# Altium PCB gravpower 007.PcbDoc (part 1 of 2)
Units mil, origin at the board's own origin, x right, y up, seen from the top; angles counter-clockwise.
Board outline 3267.72 x 2322.83 mil, 4 copper layers (Top Layer, Signal Layer 1, Signal Layer 2, Bottom Layer), stack 59.3 mil thick; 146 components, 91 nets, 539 pads, 438 vias.
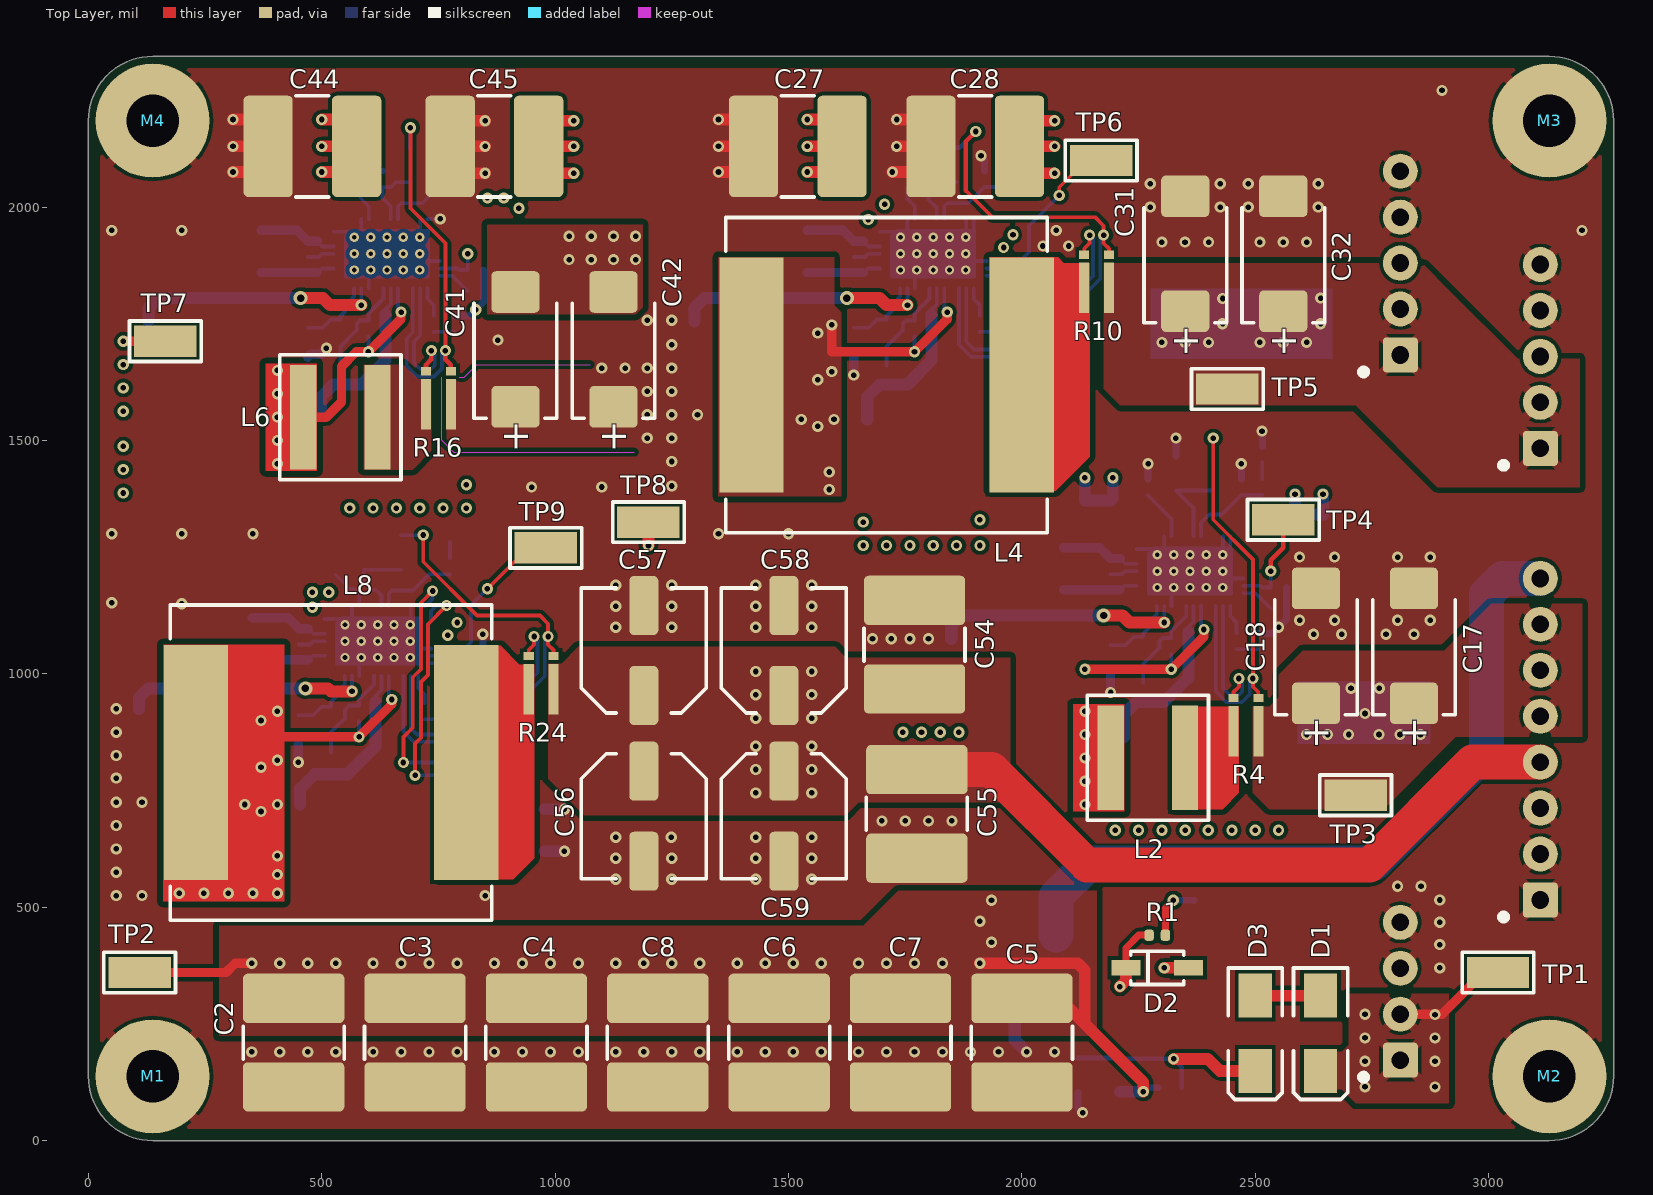
[diagram p0: Top Layer view]
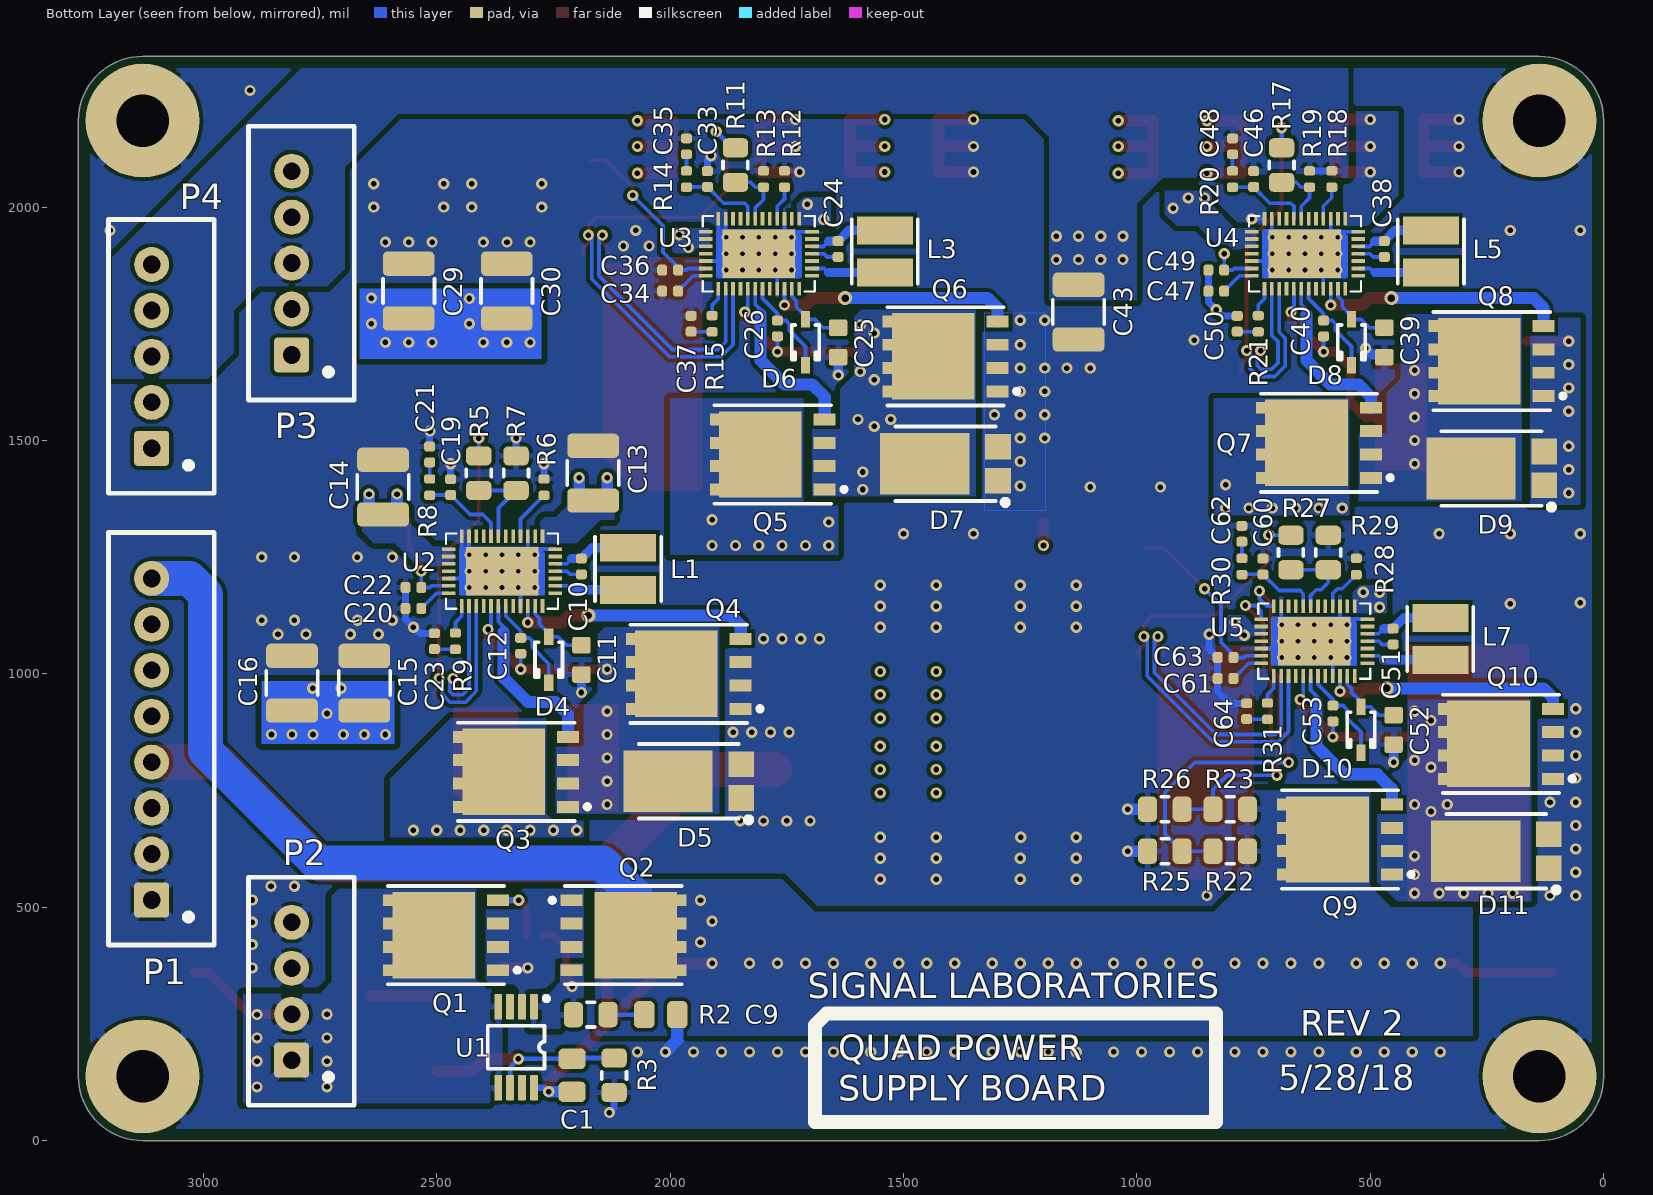
[diagram p1: Bottom Layer view, seen from below]
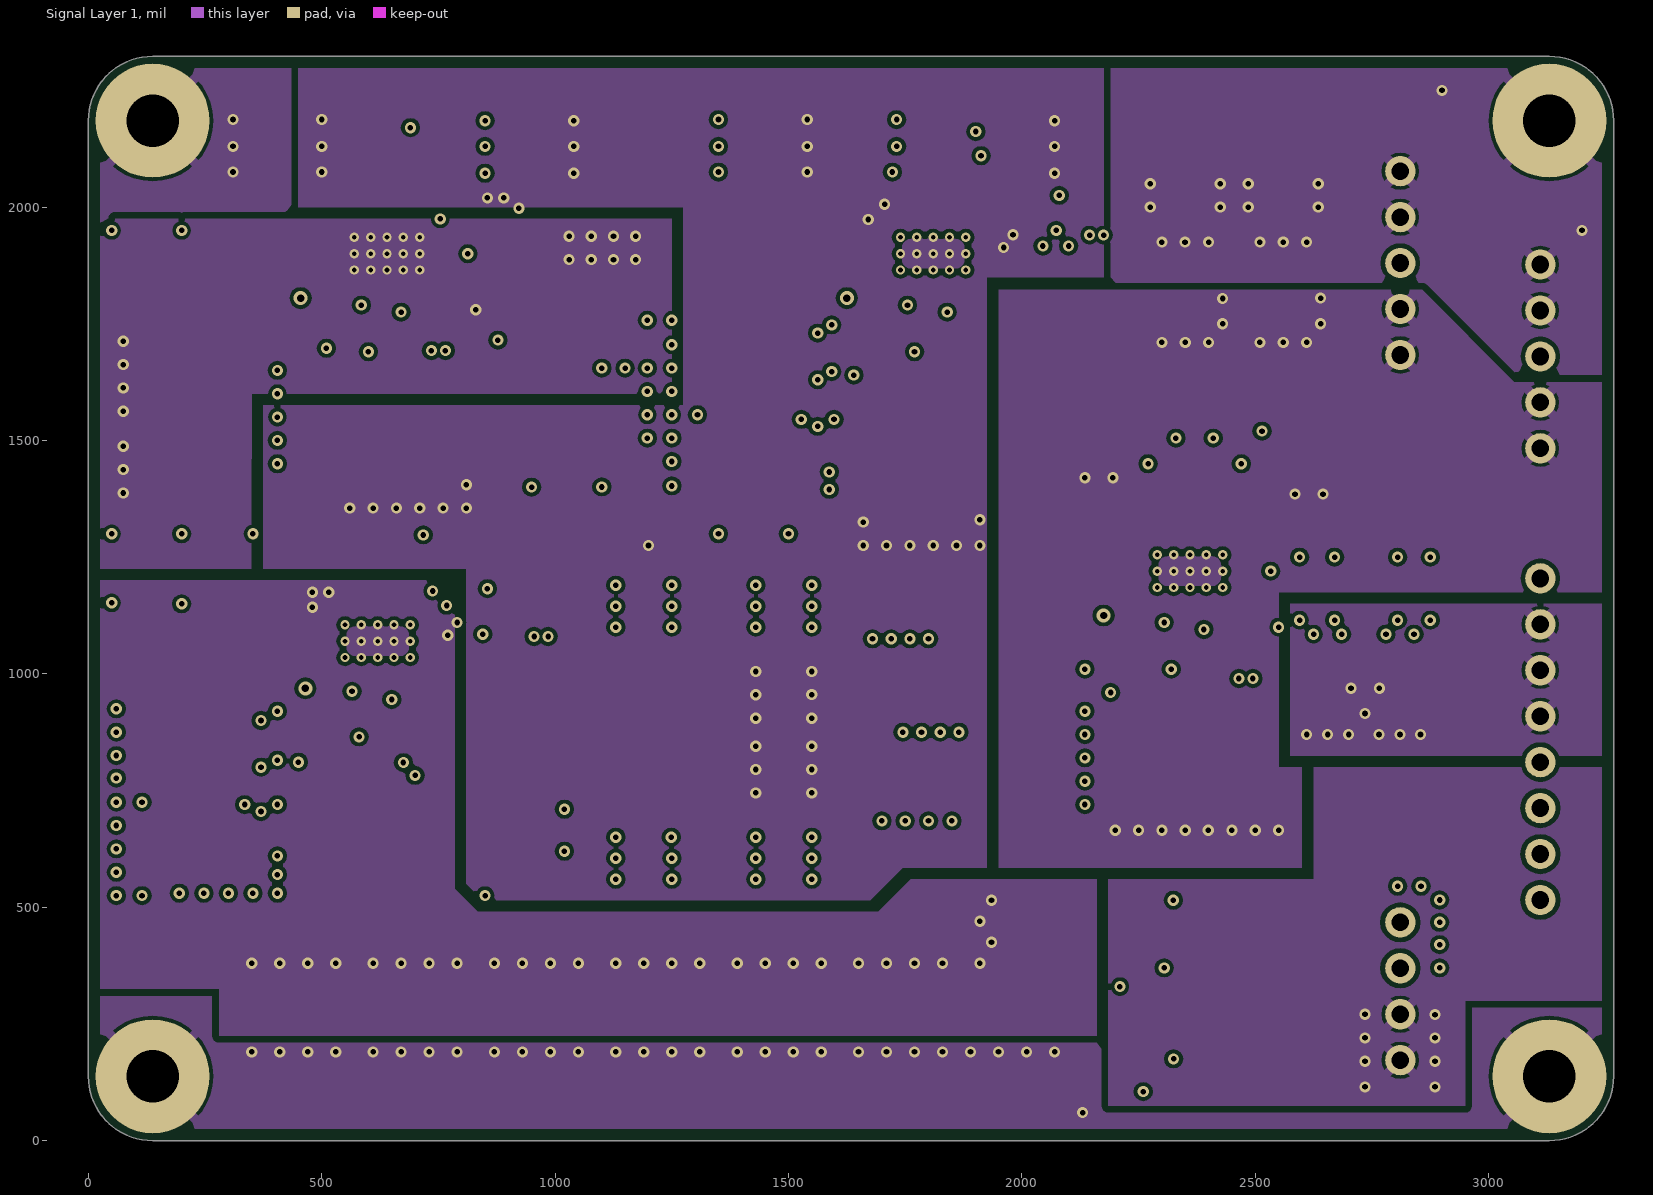
[diagram p2: Signal Layer 1]
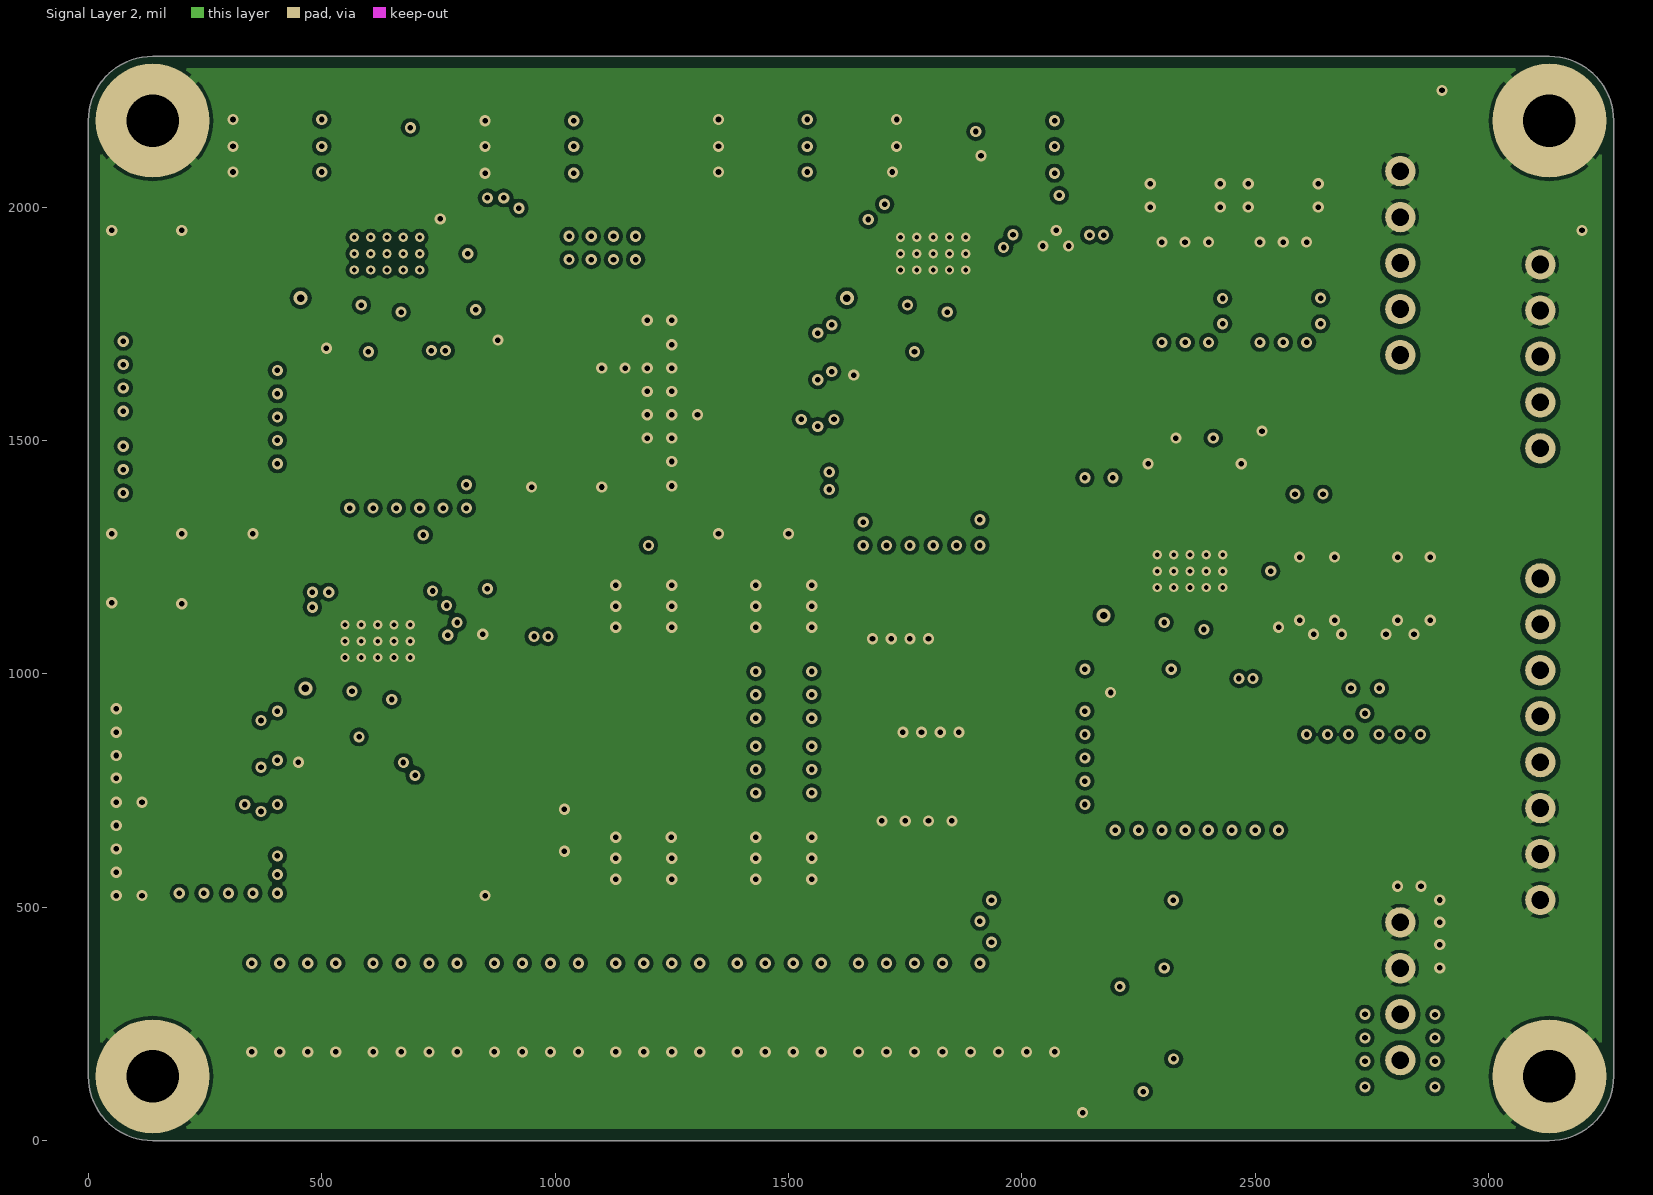
[diagram p3: Signal Layer 2]
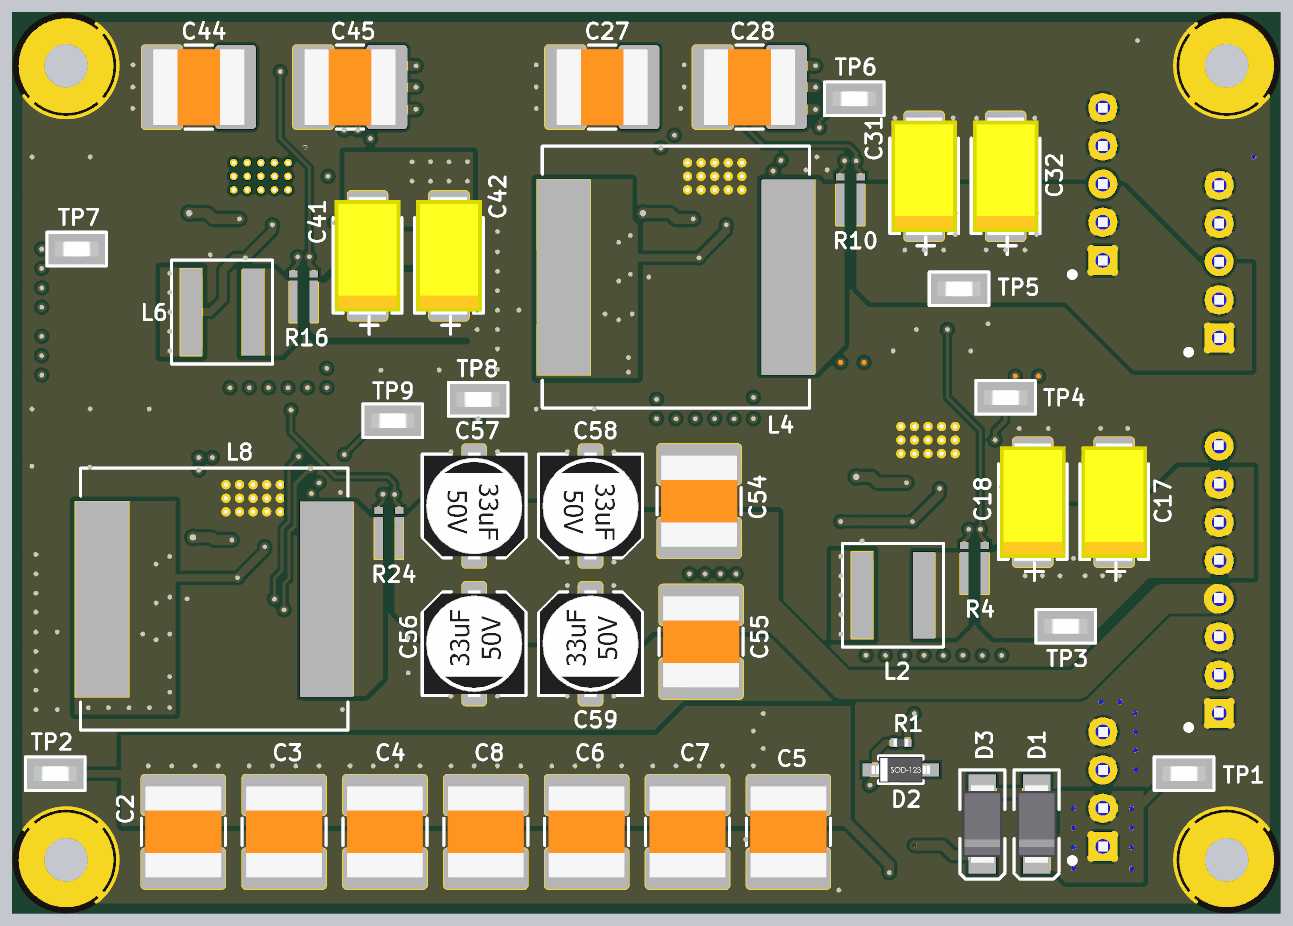
[diagram p5: 3D render of the assembled board from above, using the file's embedded part models]
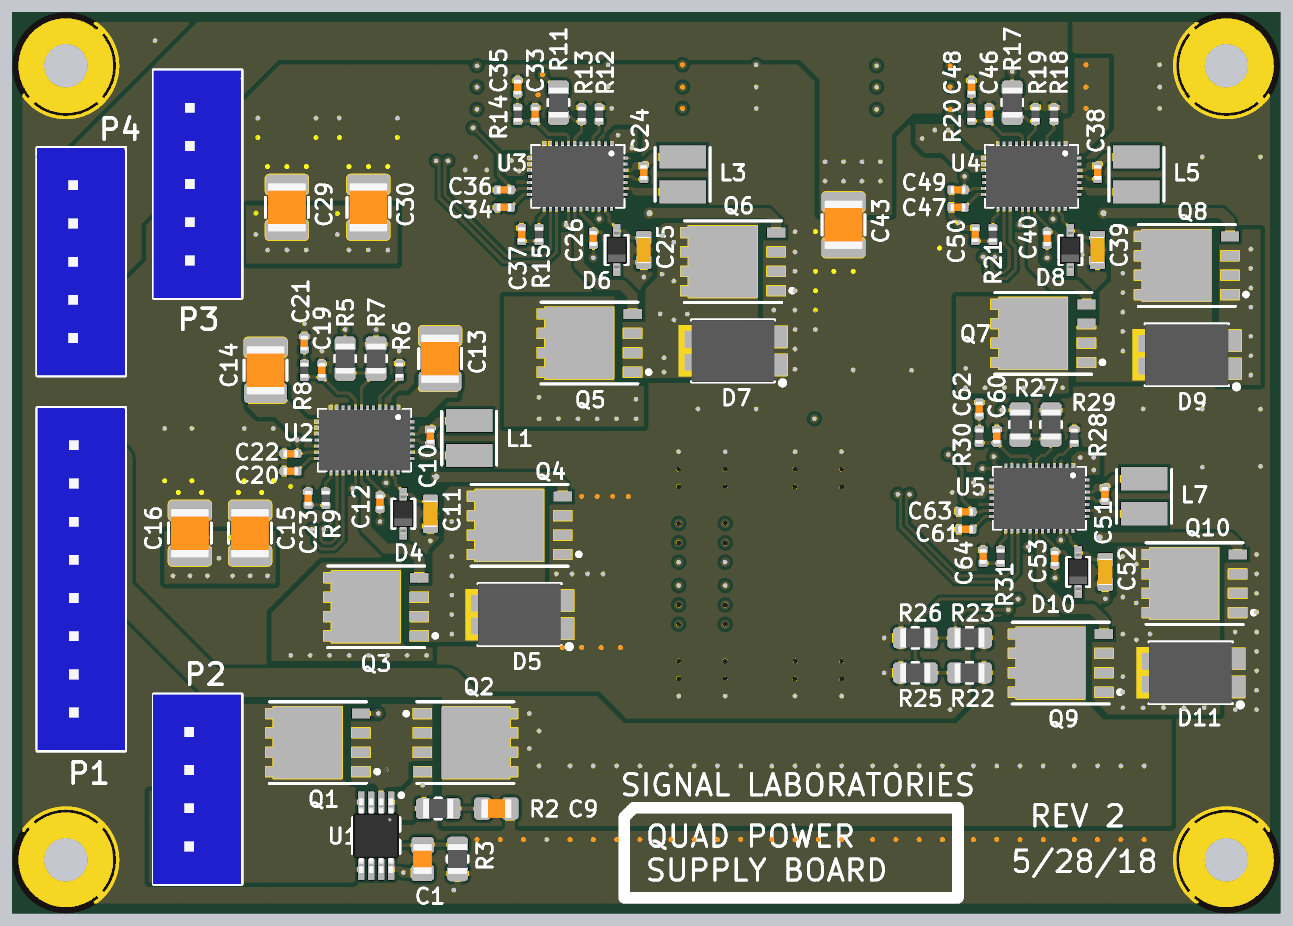
[diagram p6: 3D render of the assembled board from below, using the file's embedded part models]

## Layer stack, top to bottom
Top Solder: solder mask 0.5, Solder Resist, Dk 3.5
Top Layer: signal copper 1.4
Dielectric1: prepreg 9.8, FR-4, Dk 4.2
Signal Layer 1: signal copper 2.7
Dielectric 7: core 31.5, Dk 4.2
Signal Layer 2: signal copper 2.7
Dielectric 4: prepreg 9.8, FR-4, Dk 4.2
Bottom Layer: signal copper 1.4
Bottom Solder: solder mask 0.5, Solder Resist, Dk 3.5

## Board outline
0,137.8 0,2185.04 cw(c137.8,2185.04) 137.8,2322.83 3129.92,2322.83 cw(c3129.92,2185.04) 3267.72,2185.04 3267.72,137.8 cw(c3129.92,137.8) 3129.92,0 137.8,0 cw(c137.8,137.8)

## Design rules (kind name [scope] priority, off if disabled: settings)
BoardOutlineClearance [All] p1: gap=15 ignorepadtopadclearanceinfootprint=FALSE except(0: Arc-SplitContinuation Track-SplitContinuation SMDPad-SplitContinuation THPad-SplitContinuation Via-SplitContinuation Fill-SplitContinuation Poly-SplitContinuation Region-SplitContinuation Text-SplitContinuation; 10: Arc-SplitBarrior Track-SplitBarrior SMDPad-SplitBarrior THPad-SplitBarrior Via-SplitBarrior Fill-SplitBarrior Poly-SplitBarrior Region-SplitBarrior Text-SplitBarrior; 25: Arc-OutlineEdge Track-OutlineEdge SMDPad-OutlineEdge THPad-OutlineEdge Via-OutlineEdge Fill-OutlineEdge Poly-OutlineEdge Region-OutlineEdge Text-OutlineEdge)
Clearance Clearance_InnerLayers [OnLayer('Signal Layer 1') or OnLayer('Signal Layer 2')] p1: gap=6 ignorepadtopadclearanceinfootprint=FALSE except(0: Arc-Hole Track-Hole SMDPad-Hole THPad-Hole Via-Hole Fill-Hole Poly-Hole Region-Hole Text-Hole; 8: SMDPad-Fill SMDPad-Poly SMDPad-Region Via-Fill Via-Poly Via-Region; 10: Arc-Fill Arc-Poly Arc-Region Track-Fill Track-Poly Track-Region THPad-Fill THPad-Poly THPad-Region; 15: Fill-Fill Fill-Poly Fill-Region Poly-Poly Poly-Region Region-Region)
Clearance [All] p2: gap=6 ignorepadtopadclearanceinfootprint=FALSE except(0: Arc-Hole Track-Hole SMDPad-Hole THPad-Hole Via-Hole Fill-Hole Poly-Hole Region-Hole Text-Hole; 7.87: SMDPad-Fill SMDPad-Poly SMDPad-Region; 8: Arc-Fill Arc-Poly Arc-Region Track-Fill Track-Poly Track-Region THPad-Fill THPad-Poly THPad-Region Via-Fill Via-Poly Via-Region; 12: Fill-Fill Fill-Poly Fill-Region Poly-Poly Poly-Region Region-Region)
ComponentClearance [All] p1 off: gap=10 collisioncheckmode=3 verticalgap=10 showdistances=FALSE
DiffPairsRouting [InDifferentialPairClass('All Differential Pairs')] p1: maxlimit=10 minlimit=7.75 mostfreqgap=7.75 toplayer_minwidth=8 toplayer_maxwidth=10 toplayer_prefwidth=8 midlayer1_minwidth=8 midlayer1_maxwidth=10 midlayer1_prefwidth=8 midlayer2_minwidth=8 midlayer2_maxwidth=10 midlayer2_prefwidth=8 bottomlayer_minwidth=8 bottomlayer_maxwidth=10 bottomlayer_prefwidth=8 maxuncoupledlength=500
Height Bottom_Height [Not InComponent('P*') and OnBottomLayer] p1: minheight=0 maxheight=118.11 prefheight=108.27
Height [All] p2: minheight=0 maxheight=1000 prefheight=500
HoleSize [All] p1: absolutevalues=TRUE maxlimit=250 minlimit=10 maxpercent=80.000 minpercent=20.000
HoleToHoleClearance [All] p1: gap=12 allowstackedmicrovias=TRUE
MinimumSolderMaskSliver [All] p1: minsoldermaskwidth=3.75
PolygonConnect ThermalConnect [HasFootprint('CAPC100X50X55L25N') or HasFootprint('CAPC160X80X90L20NA') or HasFootprint('CAPC200X125X145L45N') or HasFootprint('MSOP8') or HasFootprint('RESC1005X40N') or HasFootprint('RESC2012X70N')] p1: thpad.connectstyle=Relief thpad.reliefconductorwidth=10 thpad.reliefentries=4 thpad.polygonreliefangle="90 Angle" thpad.airgapwidth=10 smdpad.connectstyle=Relief smdpad.reliefconductorwidth=12.5 smdpad.reliefentries=4 smdpad.polygonreliefangle="90 Angle" smdpad.airgapwidth=8 via.connectstyle=Relief via.reliefconductorwidth=10 via.reliefentries=4 via.polygonreliefangle="90 Angle" via.airgapwidth=10
PolygonConnect [All] p2: thpad.connectstyle=Relief thpad.reliefconductorwidth=20 thpad.reliefentries=4 thpad.polygonreliefangle="45 Angle" thpad.airgapwidth=7 smdpad.connectstyle=Direct smdpad.reliefconductorwidth=10 smdpad.reliefentries=4 smdpad.polygonreliefangle="90 Angle" smdpad.airgapwidth=10 via.connectstyle=Direct via.reliefconductorwidth=10 via.reliefentries=4 via.polygonreliefangle="90 Angle" via.airgapwidth=10
RoutingVias [All] p1: holewidth=12 width=24 viastyle="Through Hole" minholewidth=10 minwidth=20 maxholewidth=28 maxwidth=50
SilkToSilkClearance [All] p1: silktosilkclearance=5
SilkToSolderMaskClearance SilkscreenOverComponentPads [IsPad] p1: minsilkscreentomaskgap=5 clearancetoexposedcopper=TRUE
SolderMaskExpansion [All] p1: expansion=2
Width [All] p1: maxlimit=250 minlimit=8 preferedwidth=10
22 further rules are at their usual default settings.

## Classes and differential pairs
component class egress: P1 P3 P4
component class ingress: C1 C2 C3 C4 C5 C6 C7 C8 C9 D1 D2 D3 P2 Q1 Q2 R1 R2 R3 TP1 TP2 U1
component class power-v3v8: C10 C11 C12 C13 C14 C15 C16 C17 C18 C19 C20 C21 C22 C23 D4 D5 L1 L2 Q3 Q4 R4 R5 R6 R7 R8 R9 TP3 TP4 U2
component class power-v5v5n: C38 C39 C40 C41 C42 C43 C44 C45 C46 C47 C48 C49 C50 D8 D9 L5 L6 Q7 Q8 R16 R17 R18 R19 R20 R21 TP7 U4
component class power-v5v5: C24 C25 C26 C27 C28 C29 C30 C31 C32 C33 C34 C35 C36 C37 D6 D7 L3 L4 Q5 Q6 R10 R11 R12 R13 R14 R15 TP5 TP6 U3
component class power-v29: C51 C52 C53 C54 C55 C56 C57 C58 C59 C60 C61 C62 C63 C64 D10 D11 L7 L8 Q9 Q10 R22 R23 R24 R25 R26 R27 R28 R29 R30 R31 TP8 TP9 U5
component class mechanical: M1 M2 M3 M4
differential pair 3V8_SENSE: +3V8_SENSE_P -3V8_SENSE_N
differential pair 5V5_SENSE: +5V5_SENSE_P -5V5_SENSE_N
differential pair 5V5N_SENSE: +5V5N_SENSE_P -5V5N_SENSE_N
differential pair 29V_SENSE: +29V_SENSE_P -29V_SENSE_N

## Components (designator, comment, footprint, x,y, rotation, side; value= is the part's Value field where it differs from the comment)
C1 "VJ0805Y473KXB" CAPC200X125X145L45N 2210,140 r90 bottom value=47nF
C2 "CKG57NX7S2A226M500JJ" CAPC600X500X500L160N 440,210 r90 top value=22uF
C3 "CKG57NX7S2A226M500JJ" CAPC600X500X500L160N 700,210 r90 top value=22uF
C4 "CKG57NX7S2A226M500JJ" CAPC600X500X500L160N 960,210 r90 top value=22uF
C5 "CKG57NX7S2A226M500JJ" CAPC600X500X500L160N 2000,210 r90 top value=22uF
C6 "CKG57NX7S2A226M500JJ" CAPC600X500X500L160N 1480,210 r90 top value=22uF
C7 "CKG57NX7S2A226M500JJ" CAPC600X500X500L160N 1740,210 r90 top value=22uF
C8 "CKG57NX7S2A226M500JJ" CAPC600X500X500L160N 1220,210 r90 top value=22uF
C9 "VJ0805Y473KXB" CAPC200X125X145L45N 2020,270 r180 bottom value=47nF
C10 "GRM155R61A105KE15" CAPC100X50X55L25N 2190,1230 r270 bottom value=1uF
C11 "CL10A475KA8NQNC" CAPC160X80X90L20NA 2190,1030 r270 bottom value=4.7uF
C12 "GRM155R61A105KE15" CAPC100X50X55L25N 2320,1060 r270 bottom value=1uF
C13 "GRM32ER71E226KE15" CAPC320X250X270L50N 2165,1430 r270 bottom value=22uF
C14 "GRM32ER71E226KE15" CAPC320X250X270L50N 2615,1400 r270 bottom value=22uF
C15 "GRM32ER71E226KE15" CAPC320X250X270L50N 2655,980 r270 bottom value=22uF
C16 "GRM32ER71E226KE15" CAPC320X250X270L50N 2810,980 r270 bottom value=22uF
C17 "TPSE337K010R0050" CAPPM730X435X310L135X240N 2840,1060 r90 top value=330uF
C18 "TPSE337K010R0050" CAPPM730X435X310L135X240N 2630,1060 r90 top value=330uF
C19 "GRM1555C1H101FA01D" CAPC100X50X55L25N 2470,1400 r270 bottom value=100pF
C20 "VJ0402A101KXA" CAPC100X50X55L25N 2550,1140 r0 bottom value=100pF
C21 "GRM1555C1H102JA01" CAPC100X50X55L25N 2515,1470 r90 bottom value=1nF
C22 "C0402C222J3GACTU" CAPC100X50X55L25N 2550,1185 r0 bottom value=2.2nF
C23 "GRM155R71H471JA01" CAPC100X50X55L25N 2505,1070 r270 bottom value=470pF
C24 "GRM155R61A105KE15" CAPC100X50X55L25N 1640,1910 r270 bottom value=1uF
C25 "CL10A475KA8NQNC" CAPC160X80X90L20NA 1640,1710 r270 bottom value=4.7uF
C26 "GRM155R61A105KE15" CAPC100X50X55L25N 1770,1740 r270 bottom value=1uF
C27 "CKG57NX7S1H226M500JJ" CAPC600X500X500L160N 1520,2130 r0 top value=22uF
C28 "CKG57NX7S1H226M500JJ" CAPC600X500X500L160N 1900,2130 r0 top value=22uF
C29 "GRM32ER71E226KE15" CAPC320X250X270L50N 2560,1820 r270 bottom value=22uF
C30 "GRM32ER71E226KE15" CAPC320X250X270L50N 2350,1820 r270 bottom value=22uF
C31 "TPSE337K010R0050" CAPPM730X435X310L135X240N 2350,1900 r90 top value=330uF
C32 "TPSE337K010R0050" CAPPM730X435X310L135X240N 2560,1900 r90 top value=330uF
C33 "GRM1555C1H101FA01D" CAPC100X50X55L25N 1920,2060 r270 bottom value=100pF
C34 "VJ0402A101KXA" CAPC100X50X55L25N 2000,1820 r0 bottom value=100pF
C35 "GRM1555C1H102JA01" CAPC100X50X55L25N 1965,2130 r90 bottom value=1nF
C36 "C0402C222J3GACTU" CAPC100X50X55L25N 2000,1865 r0 bottom value=2.2nF
C37 "GRM155R71H471JA01" CAPC100X50X55L25N 1955,1750 r270 bottom value=470pF
C38 "GRM155R61A105KE15" CAPC100X50X55L25N 470,1910 r270 bottom value=1uF
C39 "CL10A475KA8NQNC" CAPC160X80X90L20NA 470,1710 r270 bottom value=4.7uF
C40 "GRM155R61A105KE15" CAPC100X50X55L25N 600,1740 r270 bottom value=1uF
C41 "TPSE337K010R0050" CAPPM730X435X310L135X240N 915,1695 r90 top value=330uF
C42 "TPSE337K010R0050" CAPPM730X435X310L135X240N 1125,1695 r90 top value=330uF
C43 "GRM32ER71E226KE15" CAPC320X250X270L50N 1125,1775 r270 bottom value=22uF
C44 "CKG57NX7S1H226M500JJ" CAPC600X500X500L160N 480,2130 r0 top value=22uF
C45 "CKG57NX7S1H226M500JJ" CAPC600X500X500L160N 870,2130 r0 top value=22uF
C46 "GRM1555C1H101FA01D" CAPC100X50X55L25N 750,2059.98 r270 bottom value=100pF
C47 "VJ0402A101KXA" CAPC100X50X55L25N 830,1820 r0 bottom value=100pF
C48 "GRM1555C1H102JA01" CAPC100X50X55L25N 795,2129.98 r90 bottom value=1nF
C49 "C0402C222J3GACTU" CAPC100X50X55L25N 830,1865 r0 bottom value=2.2nF
C50 "GRM155R71H471JA01" CAPC100X50X55L25N 785,1750 r270 bottom value=470pF
C51 "GRM155R61A105KE15" CAPC100X50X55L25N 450.99,1080 r270 bottom value=1uF
C52 "CL10A475KA8NQNC" CAPC160X80X90L20NA 450,880 r270 bottom value=4.7uF
C53 "GRM155R61A105KE15" CAPC100X50X55L25N 580,915 r270 bottom value=1uF
C54 "CKG57NX7S1H226M500JJ" CAPC600X500X500L160N 1770,1062.5 r270 top value=22uF
C55 "CKG57NX7S1H226M500JJ" CAPC600X500X500L160N 1775,700 r90 top value=22uF
C56 "EEE-FTH101XAP" CAPAE660X800D700L260X65N 1190,695 r270 top value=100uF
C57 "EEE-FTH101XAP" CAPAE660X800D700L260X65N 1190,1050 r90 top value=100uF
C58 "EEE-FTH101XAP" CAPAE660X800D700L260X65N 1490,1050 r90 top value=100uF
C59 "EEE-FTH101XAP" CAPAE660X800D700L260X65N 1490,695 r270 top value=100uF
C60 "GRM1555C1H101FA01D" CAPC100X50X55L25N 730,1230 r270 bottom value=100pF
C61 "VJ0402A101KXA" CAPC100X50X55L25N 810,990 r0 bottom value=100pF
C62 "GRM1555C1H102JA01" CAPC100X50X55L25N 775,1300 r90 bottom value=1nF
C63 "C0402C222J3GACTU" CAPC100X50X55L25N 810,1035 r0 bottom value=2.2nF
C64 "GRM155R71H471JA01" CAPC100X50X55L25N 765,920 r270 bottom value=470pF
D1 "SMAT70A-13-F" SMA 2640,230 r270 top
D2 "DDZ12BQ-7" SOD123 2290,370 r180 top
D3 "SMAJ24A-13-F" SMA 2500,230 r270 top
D4 "1N4448HWS-7-F" SOD323 2260,1030 r270 bottom
D5 "SBR10U200P5-13" DIODES_POWERDI5 1960,770 r90 bottom
D6 "1N4448HWS-7-F" SOD323 1710,1710 r270 bottom
D7 "SBR10U200P5-13" DIODES_POWERDI5 1410,1450 r90 bottom
D8 "1N4448HWS-7-F" SOD323 540,1710 r270 bottom
D9 "SBR10U200P5-13" DIODES_POWERDI5 240,1440 r90 bottom
D10 "1N4448HWS-7-F" SOD323 520,880 r270 bottom
D11 "SBR10U200P5-13" DIODES_POWERDI5 230,620 r90 bottom
L1 "ME3220-333KL" ME3220 2090,1225 r270 bottom value=33uH
L2 "XAL6060-472ME" XAL6060 2270,820 r0 top value=4.7uH
L3 "ME3220-333KL" ME3220 1540,1905 r270 bottom value=33uH
L4 "PA4344.103ANLT" HCM1A1707 1710,1640 r0 top value=10uH
L5 "ME3220-333KL" ME3220 370,1905 r270 bottom value=33uH
L6 "XAL6060-333ME" XAL6060 540,1550 r0 top value=33uH
L7 "ME3220-333KL" ME3220 350,1075 r270 bottom value=33uH
L8 "HCM1A1707-470-R" HCM1A1707 520,810 r0 top value=47uH
M1 "MOUNTM3_CORNERS" MOUNTM3_CORNERS 137.8,137.8 r90 top locked
M2 "MOUNTM3_CORNERS" MOUNTM3_CORNERS 3129.92,137.8 r90 top locked
M3 "MOUNTM3_CORNERS" MOUNTM3_CORNERS 3129.92,2185.04 r90 top locked
M4 "MOUNTM3_CORNERS" MOUNTM3_CORNERS 137.8,2185.04 r90 top locked
P1 "B8B-XH-A" B8B-XH-A 3090,860 r90 bottom
P2 "B4B-XH-A" B4B-XH-A 2790,320 r90 bottom
P3 "B5B-XH-A" B5B-XH-A 2790,1880 r90 bottom
P4 "B5B-XH-A" B5B-XH-A 3090,1680 r90 bottom
Q1 "BSC190N15NS3" TDSON-8 2480,440 r90 bottom
Q2 "BSC190N15NS3" TDSON-8 2100,440 r270 bottom
Q3 "BSC050NE2LS" TDSON-8 2330,790 r90 bottom
Q4 "BSC050NE2LS" TDSON-8 1960,1000 r90 bottom
Q5 "BSC190N15NS3" TDSON-8 1780,1470 r90 bottom
Q6 "BSC190N15NS3" TDSON-8 1410,1680 r90 bottom
Q7 "BSC190N15NS3" TDSON-8 610,1495 r90 bottom
Q8 "BSC190N15NS3" TDSON-8 240,1670 r90 bottom
Q9 "BSC190N15NS3" TDSON-8 565,645 r90 bottom
Q10 "BSC190N15NS3" TDSON-8 220,850 r90 bottom
R1 "MCS04020C1009FE000" RESC1005X40N 2290,440 r0 top value=10
R2 "RC0805FR-0710KL" RESC2012X70N 2170,270 r0 bottom value=10k
R3 "RC0805FR-071KL" RESC2012X70N 2120,140 r90 bottom value=1k
R4 "KRL3216T4A-M-R008-F" KRL3216T4 2480,890 r0 top value=0.008
R5 "RT0805BRD072K8L" RESC2012X70N 2410,1430 r270 bottom value=2.8k
R6 "RR0510P-393-D" RESC1005X40N 2270,1400 r90 bottom value=39k
R7 "RT0805BRD071K37L" RESC2012X70N 2330,1430 r270 bottom value=1.37k
R8 "ERJ-2RKF2212X" RESC1005X40N 2515,1400 r270 bottom value=22.1K
R9 "ERJ-2RKF2672X" RESC1005X40N 2460,1070 r270 bottom value=26.7K
R10 "KRL3216T4A-M-R003-F" KRL3216T4 2160,1840 r0 top value=0.003
R11 "RG2012P-682-B-T5" RESC2012X70N 1860,2090 r270 bottom value=6.8k
R12 "RR0510P-753-D" RESC1005X40N 1755,2060 r90 bottom value=75k
R13 "RR0510P-202-D" RESC1005X40N 1800,2060 r270 bottom value=2k
R14 "ERJ-2RKF2212X" RESC1005X40N 1965,2060 r270 bottom value=22.1K
R15 "ERJ-2RKF2672X" RESC1005X40N 1910,1750 r270 bottom value=26.7K
R16 "KRL3216T4A-M-R100-F" KRL3216T4 750,1590 r0 top value=0.1
R17 "RG2012P-682-B-T5" RESC2012X70N 690,2089.98 r270 bottom value=6.8k
R18 "RR0510P-223-D" RESC1005X40N 582.5,2060 r90 bottom value=22k
R19 "RR0510P-202-D" RESC1005X40N 630,2060 r270 bottom value=2k
R20 "ERJ-2RKF2212X" RESC1005X40N 795,2059.98 r270 bottom value=22.1K
R21 "ERJ-2RKF2672X" RESC1005X40N 740,1750 r270 bottom value=26.7K
R22 "RT0805BRD07430KL" RESC2012X70N 800,620 r180 bottom value=430k
R23 "RT0805BRD07357KL" RESC2012X70N 800,710 r180 bottom value=357k
R24 "KRL3216T4A-M-R009-F" KRL3216T4 970,980 r0 top value=0.009
R25 "ERJ-2RKF1002X" RESC2012X70N 940,620 r180 bottom value=10K
R26 "RG2012P-153-B-T5" RESC2012X70N 940,710 r180 bottom value=15k
R27 "PTN0805E2553BST1" RESC2012X70N 670,1260 r270 bottom value=255k
R28 "RR0510P-4992-D" RESC1005X40N 530,1230 r90 bottom value=49.9k
R29 "RT0805BRD0711K5L" RESC2012X70N 590,1260 r270 bottom value=11.5k
R30 "ERJ-2RKF2212X" RESC1005X40N 775,1230 r270 bottom value=22.1K
R31 "ERJ-2RKF2672X" RESC1005X40N 720,920 r270 bottom value=26.7K
TP1 "5015" 5015 3020,360 r180 top
TP2 "5015" 5015 110,360 r180 top
TP3 "5015" 5015 2715,740 r180 top
TP4 "5015" 5015 2560,1330 r180 top
TP5 "5015" 5015 2440,1610 r180 top
TP6 "5015" 5015 2170,2100 r180 top
TP7 "5015" 5015 165,1712.5 r180 top
TP8 "5015" 5015 1200,1325 r0 top
TP9 "5015" 5015 980,1270 r180 top
U1 "LTC4359HMS8" MSOP8 2330,200 r0 bottom
U2 "LT3840EUFE" QFN39P40_600X400X80L40X20T465X265N 2360,1220 r0 bottom
U3 "LT3840EUFE" QFN39P40_600X400X80L40X20T465X265N 1810,1900 r0 bottom
U4 "LT3840EUFE" QFN39P40_600X400X80L40X20T465X265N 640,1900 r0 bottom
U5 "LT3840EUFE" QFN39P40_600X400X80L40X20T465X265N 620,1070 r0 bottom

## Footprints (in the part's own frame and the unit in brackets; to place one, negate y for a bottom-side part, rotate by r counter-clockwise, add the part's x,y. Pads: shape width x height; smd on the part's side, far side on the other; paste and mask are expansions set on the pad)
5015 [mm] "Test Point SMT"
  rect 3.4x1.7 smd paste+0.2 mask+0.05: 1(0,0)
  silkscreen extent -1.95,-1.1 1.95,1.1, body extent -1.45,-0.5 1.45,0.5, height 2
B4B-XH-A [mm] "Through-hole shrouded header, 2.5mm pitch, 4-pos"
  rrect20% 1.905x1.905 / inner round 1.651 / far side rrect20% 1.905x1.905 hole 0.965: 1(-3.75,0.525)
  round 1.905 / inner round 1.651 / far side round 1.905 hole 0.965: 2(-1.25,0.525) 3(1.25,0.525) 4(3.75,0.525)
  silkscreen extent -6.2,-2.88 6.2,2.88, body extent -6.2,-2.83 6.2,2.93, height 7
B5B-XH-A [mm] "Through-hole shrouded header, 2.5mm pitch, 5-pos"
  rrect20% 1.905x1.905 / inner round 1.651 / far side rrect20% 1.905x1.905 hole 0.965: 1(-5,0.525)
  round 1.905 / inner round 1.651 / far side round 1.905 hole 0.965: 2(-2.5,0.525) 3(0,0.525) 4(2.5,0.525) 5(5,0.525)
  silkscreen extent -7.45,-2.88 7.45,2.88, body extent -7.45,-2.85 7.45,2.9, height 7
B8B-XH-A [mm] "Through-hole shrouded header, 2.5mm pitch, 8-pos"
  rrect20% 1.905x1.905 / inner round 1.651 / far side rrect20% 1.905x1.905 hole 0.965: 1(-8.75,0.525)
  round 1.905 / inner round 1.651 / far side round 1.905 hole 0.965: 2(-6.25,0.525) 3(-3.75,0.525) 4(-1.25,0.525) 5(1.25,0.525) 6(3.75,0.525) 7(6.25,0.525) 8(8.75,0.525)
  silkscreen extent -11.2,-2.88 11.25,2.88, body extent -11.15,-2.87 11.25,2.88, height 7
CAPAE660X800D700L260X65N [mm] "Capacitor, Aluminum Electrolytic; 6.60 mm L X 6.60 mm W X 8.00 mm H body"
  rrect32% 3.21x1.58 smd: 1(-2.45,0) 2(2.45,0)
  silkscreen extent -3.4,-3.4 3.4,3.4, body extent -3.5,-3.3 3.5,3.3, height 8.54
CAPC100X50X55L25N [mm] "Capacitor, Chip; 1.00 mm L X 0.50 mm W X 0.55 mm H body"
  rrect52% 0.54x0.6 smd: 1(-0.43,0) 2(0.43,0)
  body extent -0.5,-0.25 0.5,0.25, height 0.55
CAPC160X80X90L20NA [mm] "Chip Capacitor, 2-Leads, Body 1.60x0.80mm, IPC Medium Density"
  rrect25% 0.9x1 smd: 1(-0.8,0) 2(0.8,0)
  body extent -0.87,-0.48 0.87,0.48, height 0.95
CAPC200X125X145L45N [mm] "Capacitor, Chip; 2.00 mm L X 1.25 mm W X 1.45 mm H body"
  rrect45% 1.11x1.47 smd: 1(-0.9,0) 2(0.9,0)
  body extent -1,-0.63 1,0.63, height 1.45
CAPC320X250X270L50N [mm] "Capacitor, Chip; 3.20 mm L X 2.50 mm W X 2.70 mm H body"
  rrect38% 1.32x2.81 smd: 1(-1.49,0) 2(1.49,0)
  silkscreen extent -0.66,-1.4 0.66,1.4, body extent -1.6,-1.25 1.6,1.25, height 2.7
CAPC600X500X500L160N [mm] "Capacitor, Chip; 6.00 mm L X 5.00 mm W X 5.00 mm H body"
  rrect19% 2.68x5.51 smd: 1(-2.41,0) 2(2.41,0)
  silkscreen extent -0.89,-2.75 0.89,2.75, body extent -3,-2.5 3,2.5, height 5
CAPPM730X435X310L135X240N [mm] "Capacitor, Polarized, Molded Body; 7.30 mm L X 4.35 mm W X 3.10 mm H body"
  rrect22% 2.26x2.62 smd mask+0.05: 1(-3.125,0) 2(3.125,0)
  silkscreen extent -3.75,-2.25 2.5,2.25, body extent -3.87,-2.15 3.87,2.15, height 2.9
DIODES_POWERDI5 [mm] "Recifier; 2 pin, 4.05 mm L X 5.45 mm W X 1.15 mm H body"
  rect 1.4x1.39 smd mask+0.05: A(-0.92,-2.856) A(0.92,-2.856)
  rect 3.36x4.86 smd paste-4.86 mask+0: K(0,1.126)
  silkscreen extent -2.25,-3.4 2.02,2.73, body extent -2.02,-2.72 2.02,2.73, height 1.15
HCM1A1707 [mm] "Inductor, Powdered Iron, SMD"
  rect 3.5x12.8 smd: 1(-7.35,0) 2(7.35,0)
  silkscreen extent -8.75,-8.57 8.75,8.57, body extent -8.75,-8.57 8.75,8.57, height 7.05
KRL3216T4 [mm] "4-Terminal Metal Foil Resistor"
  rect 0.55x2.75 smd mask+0.05: 1(-0.675,-0.325) 2(0.675,-0.325)
  rect 0.55x0.45 smd mask+0.05: 3(-0.675,1.475) 4(0.675,1.475)
  body extent -0.8,-1.6 0.8,1.6, height 0.5
ME3220 [mm] "SMT Power Inductor"
  rect 1.52x3.05 smd mask+0.05: 1(-1.145,0) 2(1.145,0)
  silkscreen extent -1.75,-1.8 1.75,1.8, body extent -1.75,-1.4 1.75,1.4, height 2.4
MOUNTM3_CORNERS [mm] "M3 Mounting Hole"
  round 6.2 hole 2.845 mask+0.4: 1(0,0)
MSOP8 [mm] "MSOP8"
  rrect25% 0.425x1.4 smd mask+0.051: 1(-0.975,-2.2) 2(-0.325,-2.2) 3(0.325,-2.2) 4(0.975,-2.2) 5(0.975,2.2) 6(0.325,2.2) 7(-0.325,2.2) 8(-0.975,2.2)
  silkscreen extent -1.77,-2.77 1.55,1.17, body extent -1.5,-2.45 1.5,2.45, height 1.15
QFN39P40_600X400X80L40X20T465X265N [mm] "Quad Flat No-Lead (QFN with Tab), 0.40 mm pitch; rect., 12 pin X 7 pin, 6.00 mm L X 4.00 mm W X 0.80 mm H body"
  rect 0.2x0.74 smd mask+0.05: 1(-2.2,-1.895) 2(-1.8,-1.895) 3(-1.4,-1.895) 4(-1,-1.895) 5(-0.6,-1.895) 6(-0.2,-1.895) 7(0.2,-1.895) 8(0.6,-1.895) 9(1,-1.895) 10(1.4,-1.895) 11(1.8,-1.895) 12(2.2,-1.895) 20(2.2,1.895) 21(1.8,1.895) 22(1.4,1.895) 23(1,1.895) 24(0.6,1.895) 25(0.2,1.895) 26(-0.2,1.895) 27(-0.6,1.895) 28(-1,1.895) 29(-1.4,1.895) 30(-1.8,1.895) 31(-2.2,1.895)
  rect 0.74x0.2 smd mask+0.05: 13(2.895,-1.2) 14(2.895,-0.8) 15(2.895,-0.4) 16(2.895,0) 17(2.895,0.4) 18(2.895,0.8) 19(2.895,1.2) 32(-2.895,1.2) 33(-2.895,0.8) 34(-2.895,0.4) 35(-2.895,0) 36(-2.895,-0.4) 37(-2.895,-0.8) 38(-2.895,-1.2)
  rect 3.95x2.65 smd paste-3.95 mask+0: 39(0,0)
  Top Layer region: 2.325,0 2.325,-1.225 2.324,-1.241 2.32,-1.256 2.314,-1.27 2.306,-1.284 2.296,-1.296 2.284,-1.306 2.27,-1.314 2.256,-1.32 2.241,-1.324 -1.975,-1.325 -2.325,-0.975 -2.325,1.225 -2.324,1.241 -2.32,1.256 -2.314,1.27 -2.306,1.284 -2.296,1.296 -2.284,1.306 -2.27,1.314 -2.256,1.32 -2.241,1.324 2.225,1.325 2.241,1.324 2.256,1.32 2.27,1.314 2.284,1.306 2.296,1.296 2.306,1.284 2.314,1.27 2.32,1.256 2.324,1.241 2.325,1.225 2.325,0
  silkscreen extent -3.05,-2.05 3.05,2.05, body extent -3.05,-2.05 3.05,2.05, height 0.8
RESC1005X40N [mm] "Resistor, Chip; 1.00 mm L X 0.50 mm W X 0.40 mm H body"
  rrect50% 0.51x0.6 smd: 1(-0.445,0) 2(0.445,0)
  body extent -0.5,-0.25 0.5,0.25, height 0.4
RESC2012X70N [mm] "Resistor, Chip; 2.00 mm L X 1.25 mm W X 0.70 mm H body"
  rrect50% 1.04x1.38 smd: 1(-0.94,0) 2(0.94,0)
  silkscreen extent -0.2,-0.67 0.2,0.67, body extent -1,-0.63 1,0.63, height 0.7
SMA [mm] "DO-214-AC/SMA; 2 C-Bend Leads; Body 5 x 2.7 mm, inc. leads (LxW)"
  rect 2.4x1.8 smd: 1(-2.05,0) 2(2.05,0)
  silkscreen extent -3.55,-1.48 3.6,1.48, body extent -2.6,-1.3 2.6,1.3, height 2.4
SOD123 [mm] "SOD-123; 2 Leads; Body 2.7 x 1.6 mm, (LxW)"
  rect 1.6x0.85 smd: 1(-1.7,0) 2(1.7,0)
  silkscreen extent -1.45,-0.9 1.45,0.9, body extent -1.92,-0.85 1.92,0.85, height 1.45
SOD323 [mm] "SOD-323/SC-76; 2 Leads; Body 1.7 x 1.3 mm, (LxW)"
  rect 0.9x0.5 smd: A(-1.25,0) K(1.25,0)
  silkscreen extent -0.95,-0.75 0.95,0.75, body extent -1.3,-0.67 1.3,0.68, height 1.1
TDSON-8 [mm] "Power FET Package 5x6mm TDSON-8"
  rect 0.65x1.2 smd: 1(-1.905,-2.825) 2(-0.635,-2.825) 3(0.635,-2.825) 4(1.905,-2.825) 5(1.905,2.825) 5(1.905,2.825) 6(0.635,2.825) 7(-0.635,2.825) 8(-1.905,2.825)
  rect 4.7x4.5 smd: 9(0,0.675)
  silkscreen extent -2.68,-4 2.68,3.17, body extent -2.68,-3.17 2.68,3.17, height 1
XAL6060 [mm] "Shielded Power Inductor"
  rect 1.43x5.69 smd: 1(-2.02,0) 2(2.02,0)
  silkscreen extent -3.3,-3.4 3.3,3.4, body extent -3.3,-3.4 3.3,3.4, height 6.1

## Part data
C1 C9: "Ceramic Capacitor 47nF ±10% 100V X7R 0805", Manufacturer=Vishay, Package=0805, Tolerance=±10%, Voltage=100V, Manufacturer P/N=VJ0805Y473KXB, Tr=-55:150
C2 C3 C4 C5 C6 C7 C8: library part CAP, "Ceramic Capacitor 22uF ±20% 100V X7S Stacked", Manufacturer=TDK, Package=2220, Tolerance=±20%, Voltage=100V, Manufacturer P/N=CKG57NX7S2A226M500JJ, Tr=-55:125
C10 C24 C38 C51: library part CAP, "Ceramic Capacitor 1uF ±10% 10V X5R 0402", Manufacturer=Murata, Package=0402, Tolerance=±10%, Voltage=10V, Manufacturer P/N=GRM155R61A105KE15, Tr=-55:125
C11 C25 C39 C52: library part TMK212B7475KG, "Ceramic Capacitor 4.7uF ±10% 25V X5R 0603", Manufacturer=Samsung, Package=0603, Tolerance=±10%, Voltage=25V, Manufacturer P/N=CL10A475KA8NQNC, Tr=-55:85
C12 C26 C40: library part UMK212B7105KG, "Ceramic Capacitor 1uF ±10% 10V X5R 0402", Manufacturer=Murata, Package=0402, Tolerance=±10%, Voltage=50V, Manufacturer P/N=GRM155R61A105KE15
C13 C14 C15 C16 C29 C30 C43: library part CAP, "Ceramic Capacitor 22uF ±10% 25V X7R 1210", Manufacturer=Murata, Package=1210, Tolerance=±10%, Voltage=25V, Manufacturer P/N=GRM32ER71E226KE15, Tr=-55:125
C17 C18 C31 C32 C41 C42: library part CAP_POL, "Tantalum Capacitor 330uF ±10% 10V 2917", Manufacturer=AVX, Package=2917, Tolerance=±10%, Voltage=10V, Manufacturer P/N=TPSE337K010R0050, Tr=-55:125
C19 C33 C46 C60: library part CAP, "Ceramic Capacitor 100pF ±1% 50V NP0 0402", Manufacturer=Murata, Package=0402, Tolerance=±1%, Voltage=50V, Manufacturer P/N=GRM1555C1H101FA01D, Tr=-55:125
C20 C34 C47 C61: "Ceramic Capacitor 100pF ±10% 50V C0G 0402", Manufacturer=Vishay, Package=0402, Tolerance=±10%, Voltage=50V, Manufacturer P/N=VJ0402A101KXA, Tr=-55:150
C21 C35 C48 C62: library part CAP, "Ceramic Capacitor 1nF ±5% 50V NP0 0402", Manufacturer=Murata, Package=0402, Tolerance=±5%, Voltage=50V, Manufacturer P/N=GRM1555C1H102JA01, Tr=-55:125
C22 C36 C49 C63: library part CAP, "Ceramic Capacitor 2.2nF ±5% 25V NP0 0402", Manufacturer=Kemet, Package=0402, Tolerance=±5%, Voltage=25V, Manufacturer P/N=C0402C222J3GACTU, Tr=-55:125
C23 C37 C50 C64: library part CAP, "Ceramic Capacitor 470pF ±5% 50V X7R 0402", Manufacturer=Murata, Package=0402, Tolerance=±5%, Voltage=50V, Manufacturer P/N=GRM155R71H471JA01, Tr=-55:125
C27 C28 C44 C45 C54 C55: library part CAP, "Ceramic Capacitor 22uF ±20% 50V X7S Stacked", Manufacturer=TDK, Package=2220, Tolerance=±20%, Voltage=50V, Manufacturer P/N=CKG57NX7S1H226M500JJ, Tr=-55:125
C53: library part UMK212B7105KG, "Ceramic Capacitor 1uF ±10% 10V X5R 0402", Manufacturer=Murata, Package=0402, Tolerance=±10%, Voltage=10V, Manufacturer P/N=GRM155R61A105KE15
C56 C57 C58 C59: library part CAP_POL, "Aluminum Electrolytic Capacitor 100uF ±20% 50V", Manufacturer=Panasonic, Package="6.3mm Radial", Tolerance=±20%, Voltage=50V, Manufacturer P/N=EEE-FTH101XAP, Tr=-55:105
D1: library part TVS, "TVS Diode 70V/100V SMA", Manufacturer="Diodes Inc", Manufacturer P/N=SMAT70A-13-F, Vz=70V
D2: library part ZENER, "Zener Diode 12V 370mW SOD123", Manufacturer="Diodes Inc", Package=SOD-123, Manufacturer P/N=DDZ12BQ-7, Vz=12V
D3: library part TVS, "TVS Diode 24V/38.9V SMA", Manufacturer="Diodes Inc", Manufacturer P/N=SMAJ24A-13-F, Vz=24V
D4 D6 D8 D10: "Schottky Diode 80V 250mA SOD323", Manufacturer="Diodes Inc", Package=SOD323, Alternative P/N=1N4448, Manufacturer P/N=1N4448HWS-7-F
D5 D7 D9 D11: library part PDS5100H, "Schottky Diode 200V 10A SMD", Current=10A, Manufacturer="Diodes Inc", Package=PowerDi-5, Reverse Voltage (max)=200V, Manufacturer P/N=SBR10U200P5-13
L1 L3 L5 L7: library part COIL, "Inductor 33uH ±10% 500mA SMD", Manufacturer=Coilcraft, Tolerance=±10%, I(sat)=500mA, Manufacturer P/N=ME3220-333KL, Tr=-40:85
L2: library part COIL, "Inductor 4.7uH,10.5A(sat), SMD", Manufacturer=Coilcraft, I(sat)=10.5A, Manufacturer P/N=XAL6060-472ME
L4: library part COIL, "Inductor 10uH, 22A(sat), SMD", Manufacturer="Pulse Electronics Power", I(sat)=22A, Manufacturer P/N=PA4344.103ANLT, Notes="Same size inductor as HCM1A1707"
L6: library part COIL, "Inductor 33uH,3.7A(sat), SMD", Manufacturer=Coilcraft, I(sat)=3.7A, Manufacturer P/N=XAL6060-333ME
L8: library part COIL, "Inductor 47uH, 8A(sat), SMD", Manufacturer=Eaton, I(sat)=8A, Manufacturer P/N=HCM1A1707-470-R
M1 M2 M3 M4: library part MOUNT
P1: library part S8B-XH-A, "2.5mm pitch 8-position connector", Manufacturer=JST, Manufacturer P/N=B8B-XH-A
P2: library part S4B-XH-A, "2.5mm pitch 4-position connector", Manufacturer=JST, Manufacturer P/N=B4B-XH-A
P3 P4: library part S5B-XH-A, "2.5mm pitch 5-position connector", Manufacturer=JST, Manufacturer P/N=B5B-XH-A
Q1 Q2 Q5 Q6 Q7 Q8 Q9 Q10: "MOSFET N-Channel Enhancement Mode", Manufacturer=Infineon, Id(max)=50A, Manufacturer P/N=BSC190N15NS3, Rds(on)=19mOhm, Vds(max)=150V
Q3 Q4: library part BSC190N15NS3, "MOSFET N-Channel Enhancement Mode", Manufacturer=Infineon, Id(max)=58A, Manufacturer P/N=BSC050NE2LS, Rds(on)=5mOhm, Vds(max)=25V
R1: library part RES, "Thin Film Resistor 10 Ohm ±1% 0402", Manufacturer=Vishay, Package=0402, Tolerance=±1%, Manufacturer P/N=MCS04020C1009FE000, Tr=-55:155
R2: library part RES, "Thin Film Resistor 10k +/-1% SMD 0805", Manufacturer=Yageo, Package=0805, Tolerance=±1%, Voltage=150V, Manufacturer P/N=RC0805FR-0710KL, Tr=-55:155
R3: library part RES, "Thin Film Resistor 1k +/-1% SMD 0805", Manufacturer=Yageo, Package=0805, Tolerance=±1%, Voltage=150V, Manufacturer P/N=RC0805FR-071KL, Tr=-55:155
R4: "Current Sense Resistor 8 mOhms +/-1% SMD 4-Terminal", Manufacturer=Susumu, Tolerance=±1%, Manufacturer P/N=KRL3216T4A-M-R008-F, Tr=-55:+155
R5: library part RES, "Thin Film Resistor 2.8k +/-0.1% SMD 0805", Manufacturer=Yageo, Package=0805, Tolerance=±0.1%, Manufacturer P/N=RT0805BRD072K8L, Tr=-55:155
R6: library part RES, "Thin Film Resistor 39k +/-0.5% SMD 0402", Manufacturer=Susumu, Package=0402, Tolerance=±0.5%, Manufacturer P/N=RR0510P-393-D, Tr=-55:155
R7: library part RES, "Thin Film Resistor 1.37k +/-0.1% SMD 0805", Manufacturer=Yageo, Package=0805, Tolerance=±0.1%, Manufacturer P/N=RT0805BRD071K37L, Tr=-55:155
R8 R14 R20 R30: library part "RES 0402", "Thick Film Resistor 22.1k ±1% 0402", Manufacturer=Panasonic, Package=0402, Tolerance=±1%, Manufacturer P/N=ERJ-2RKF2212X, Tr=-55:155
R9 R15 R21 R31: library part "RES 0402", "Thick Film Resistor 26.7k ±1% 0402", Manufacturer=Panasonic, Package=0402, Tolerance=±1%, Manufacturer P/N=ERJ-2RKF2672X, Tr=-55:155
R10: "Current Sense Resistor 3 mOhms +/-1% SMD 4-Terminal", Manufacturer=Susumu, Tolerance=±1%, Manufacturer P/N=KRL3216T4A-M-R003-F, Tr=-55:+155
R11 R17: library part RES, "Thin Film Resistor 6.8k +/-0.1% SMD 0805", Manufacturer=Susumu, Package=0805, Tolerance=±0.1%, Manufacturer P/N=RG2012P-682-B-T5, Tr=-55:155
R12: library part RES, "Thin Film Resistor 75k +/-0.5% SMD 0402", Manufacturer=Susumu, Package=0402, Tolerance=±0.5%, Manufacturer P/N=RR0510P-753-D, Tr=-55:155
R13 R19: library part RES, "Thin Film Resistor 2k +/-0.5% SMD 0402", Manufacturer=Susumu, Package=0402, Tolerance=±0.5%, Manufacturer P/N=RR0510P-202-D, Tr=-55:155
R16: "Current Sense Resistor 100 mOhms +/-1% SMD 4-Terminal", Manufacturer=Susumu, Tolerance=±1%, Manufacturer P/N=KRL3216T4A-M-R100-F, Tr=-55:+155
R18: library part RES, "Thin Film Resistor 22k +/-0.5% SMD 0402", Manufacturer=Susumu, Package=0402, Tolerance=±0.5%, Manufacturer P/N=RR0510P-223-D, Tr=-55:155
R22: library part RES, "Thin Film Resistor 430k +/-0.1% SMD 0805", Manufacturer=Yageo, Package=0805, Tolerance=±0.1%, Manufacturer P/N=RT0805BRD07430KL, Tr=-55:155
R23: library part RES, "Thin Film Resistor 357k +/-0.1% SMD 0805", Manufacturer=Yageo, Package=0805, Tolerance=±0.1%, Manufacturer P/N=RT0805BRD07357KL, Tr=-55:155
R24: "Current Sense Resistor 9 mOhms +/-1% SMD 4-Terminal", Manufacturer=Susumu, Tolerance=±1%, Manufacturer P/N=KRL3216T4A-M-R009-F, Tr=-55:+155
R25: library part RES, "Thick Film Resistor 10k ±1% 0.1W 50V 0402", Manufacturer=Panasonic, Package=0402, Tolerance=±1%, Manufacturer P/N=ERJ-2RKF1002X, Tr=-55:155
R26: library part RES, "Thin Film Resistor 15k +/-0.1% SMD 0805", Manufacturer=Susumu, Package=0805, Tolerance=±0.1%, Manufacturer P/N=RG2012P-153-B-T5, Tr=-55:155
R27: library part RES, "Thin Film Resistor 255k +/-0.1% SMD 0805", Manufacturer=Vishay, Package=0805, Tolerance=±0.1%, Manufacturer P/N=PTN0805E2553BST1, Tr=-55:155
R28: library part RES, "Thin Film Resistor 49.9k +/-0.5% SMD 0402", Manufacturer=Susumu, Package=0402, Tolerance=±0.5%, Manufacturer P/N=RR0510P-4992-D, Tr=-55:155
R29: library part RES, "Thin Film Resistor 11.5k +/-0.1% SMD 0805", Manufacturer=Yageo, Package=0805, Tolerance=±0.1%, Manufacturer P/N=RT0805BRD0711K5L, Tr=-55:155
TP1 TP2 TP3 TP4 TP5 TP6 TP7 TP8 TP9: library part TEST_POINT_SMD_50, "Test Point SMD", Manufacturer=Keystone, Manufacturer P/N=5015, Notes="SMD Loop"
U1: "Ideal Diode Controller", Manufacturer="Linear Technology", Manufacturer P/N=LTC4359HMS8
U2 U3 U4 U5: "Synchronous Regulator Controller", Manufacturer="Linear Technology", Alternative P/N=LT3840IUFE, Manufacturer P/N=LT3840EUFE

## Via types
v1: diameter 24, hole 12, Top Layer to Bottom Layer, tented both sides, 374 vias
v2: diameter 20, hole 10, Top Layer to Bottom Layer, 60 vias
v3: diameter 30, hole 16, Top Layer to Bottom Layer, 4 vias

## Nets (pads, with @x,y where several pads share a name; then routed paths per layer and width w, separated by ;. In a path a pad name is that pad's centre, name@x,y a point inside that pad or via, vN(x,y) a via of type N, cw(c..) or ccw(c..) an arc to the next point about the centre after c; other vN are vias at no path point)
3V8_SENSE_N: R4.4 R5.1 U2.22 | length 944.3
  Top Layer w8: v1(2410,1505) 2410,1330 2495,1245 v1(2495,990) 2495,972.5 2506.57,960.93 R4.4@2506.57,948.07
  Bottom Layer w8: R5.1@2410,1467.01 v1(2410,1505) ; U2.22@2415.12,1145.39 2415.12,962.61 2438.48,939.25 2471.52,939.25 2487.87,955.6 2487.87,982.87 v1(2495,990)
3V8_SENSE_P: R4.3 U2.21 | length 303.9
  Top Layer w8: R4.3@2453.43,948.07 2453.43,960.93 2465,972.5 v1(2465,990)
  Bottom Layer w8: U2.21@2430.87,1145.39 2430.87,969.13 2445,955 2465,955 2472.13,962.13 2472.13,982.87 v1(2465,990)
5V5_SENSE_N: R10.4 R11.1 U3.22 | length 1184.1
  Top Layer w8: 1880,2035 1936.57,1978.43 2156.57,1978.43 2175,1960 v1(2175,1940) 2175,1922.5 2186.57,1910.93 R10.4@2186.57,1898.07
  Top Layer w10: 1880,2035 1880,2140.42 v1(1901.34,2161.76)
  Bottom Layer w8: U3.22@1865.12,1825.39 1865.12,1705.11 1890.98,1679.25 1988.48,1679.25 2001.52,1679.25 2167.87,1845.6 2167.87,1932.87 v1(2175,1940)
  Bottom Layer w10: R11.1@1860,2127.01 1866.59,2127.01 v1(1901.34,2161.76)
5V5_SENSE_P: R10.3 U3.21 | length 594.5
  Top Layer w8: R10.3@2133.43,1898.07 2133.43,1910.93 2145,1922.5 v1(2145,1940)
  Bottom Layer w8: U3.21@1880.87,1825.39 1880.87,1711.63 1897.5,1695 1995,1695 2152.13,1852.13 2152.13,1932.87 v1(2145,1940)
5V5N_SENSE_N: R16.4 R17.1 U4.22 | length 905.8
  Top Layer w8: v1(690,2170) 690,1997.5 765,1922.5 v1(765,1692.5)
  Top Layer w10: v1(765,1692.5) 765,1673.5 776.57,1661.93 R16.4@776.57,1648.07
  Bottom Layer w8: U4.22@695.12,1825.39 695.12,1731.64 682.06,1718.58 682.06,1659.59 704.89,1636.75 740.49,1636.75 757.87,1654.14 757.87,1685.37 v1(765,1692.5)
  Bottom Layer w10: R17.1@690,2126.99 v1(690,2170)
5V5N_SENSE_P: R16.3 U4.21 | length 302
  Top Layer w10: R16.3@723.43,1648.07 723.43,1661.93 735,1673.5 v1(735,1692.5)
  Bottom Layer w8: U4.21@710.87,1825.39 710.87,1725.12 697.8,1712.06 697.8,1666.11 711.42,1652.5 733.96,1652.5 742.13,1660.66 742.13,1685.37 v1(735,1692.5)
29V_SENSE_N: R24.4 R27.1 U5.22 | length 1078.5
  Top Layer w8: v1(717.5,1297.5) 717.5,1240 832.5,1125 967.5,1125 985,1107.5 v1(985,1080) 985,1062.5 996.57,1050.93 R24.4@996.57,1038.07
  Bottom Layer w8: R27.1@670,1297.01 717.01,1297.01 v1(717.5,1297.5) ; U5.22@675.12,995.39 675.12,876.59 697.45,854.25 836.52,854.25 977.87,995.6 977.87,1072.87 v1(985,1080)
29V_SENSE_P: R24.3 U5.21 | length 571.3
  Top Layer w8: R24.3@943.43,1038.07 943.43,1050.93 955,1062.5 v1(955,1080)
  Bottom Layer w8: U5.21@690.87,995.39 690.87,883.11 703.98,870 830,870 962.13,1002.13 962.13,1072.87 v1(955,1080)
GND: C2.1 C3.1 C4.1 C5.1 C6.1 C7.1 C8.1 C9.2 C11.2 C13.1 C14.1 C15.1 C16.1 C17.2 C18.2 C19.1 C20.2 C21.2 C22.2 C23.1 C25.2 C27.1 C28.1 C29.1 C30.1 C31.2 C32.2 C33.1 C34.2 C35.2 C36.2 C37.1 C39.2 C41.1 C42.1 C43.2 C44.1 C45.1 C52.2 C54.1 C55.1 C56.2 C57.2 C58.2 C59.2 C60.1 C61.2 C62.2 C63.2 C64.1 D5.A D7.A D11.A M1.1 M2.1 M3.1 M4.1 P1.1 P1.2 P1.3 P2.3 P2.4 P3.4 P3.5 P4.4 P4.5 Q4.1 Q4.2 Q4.3 Q6.1 Q6.2 Q6.3 Q10.1 Q10.2 Q10.3 R3.1 R6.2 R7.1 R12.2 R13.1 R16.2 R25.1 R26.1 R28.2 R29.1 U2.3 U2.11 U2.12 U2.17 U2.28 U2.38 U2.39 U3.3 U3.11 U3.12 U3.17 U3.28 U3.38 U3.39 U4.12 U5.3 U5.11 U5.17 U5.28 U5.38 U5.39 | length 3169.3
  Top Layer w25: v1(310,2075) 385.12,2075 C44.1@385.12,2130 ; v1(310,2130) C44.1@385.12,2130 ; v1(310,2187.5) 385.12,2187.5 C44.1@385.12,2130 ; v1(850,2072.5) 775.12,2072.5 C45.1@775.12,2130 ; v1(850,2130) C45.1@775.12,2130 ; v1(850,2185) 775.12,2185 C45.1@775.12,2130 ; v1(1350,2075) 1425.12,2075 C27.1@1425.12,2130 ; v1(1350,2130) C27.1@1425.12,2130 ; v1(1350,2187.5) 1425.12,2187.5 C27.1@1425.12,2130 ; v1(1722.5,2075) 1806.69,2075 C28.1@1806.69,2130 ; v1(1731.57,2130) C28.1@1805.12,2130 C28.1@1806.69,2130 ; v1(1731.57,2187.5) 1806.69,2187.5 C28.1@1806.69,2130
  Bottom Layer w8: U5.38@506.02,1117.24 537.76,1117.24 v2(550,1105) ; v2(550,1070) 564.88,1084.88 U5.3@564.88,1144.61 ; U5.28@580.63,995.39 580.63,1030.63 v2(585,1035) ; v2(690,1070) 705.75,1054.25 U5.17@733.98,1054.25 ; v2(690,1105) 690.87,1105.87 U5.11@690.87,1144.61 ; U4.12@726.61,1974.61 v1(753.98,1974.61) ; U3.38@1696.02,1947.24 1727.76,1947.24 v2(1740,1935) ; v2(1740,1900) 1754.88,1914.88 U3.3@1754.88,1974.61 ; U3.28@1770.63,1825.39 1770.63,1860.63 v2(1775,1865) ; v2(1880,1900) 1895.75,1884.25 U3.17@1923.98,1884.25 ; v2(1880,1935) U3.39@1880.87,1935.87 ; U3.11@1880.87,1974.61 U3.39@1880.87,1935.87 ; U3.12@1896.61,1974.61 1896.61,1951.61 U3.39@1880.87,1935.87 ; U2.38@2246.02,1267.24 2277.76,1267.24 v2(2290,1255) ; U2.3@2304.88,1294.61 2304.88,1240.12 v2(2325,1220) ; U2.28@2320.63,1145.39 2320.63,1180.63 v2(2325,1185) ; v2(2430,1220) 2445.75,1204.25 U2.17@2473.98,1204.25 ; v2(2430,1255) U2.39@2430.87,1255.87 ; U2.11@2430.87,1294.61 U2.39@2430.87,1255.87 ; U2.12@2446.61,1294.61 2446.61,1271.61 U2.39@2430.87,1255.87
  Bottom Layer w15: C64.1@765,936.93 801.35,936.93 826.93,962.51 C61.2@826.93,990 C63.2@826.93,1035 845,1053.07 v1(845,1085) ; v1(1912.5,2110) 1920,2102.5 C33.1@1920,2076.93 ; R3.1@2120,102.99 2120,70 v1(2130,60) ; R6.2@2270,1417.52 2270,1449.65 v1(2270.35,1450) ; R7.1@2330,1467.01 v1(2330,1505) ; C19.1@2470,1416.93 v1(2470,1450) ; C23.1@2505,1086.93 2536.93,1086.93 v1(2550,1100) 2566.93,1116.93 C20.2@2566.93,1140 C22.2@2566.93,1185 ; v1(2514.41,1520) 2515,1519.41 C21.2@2515,1486.93
  Bottom Layer w20: v1(450,810.79) C52.2@450,848.5 ; C39.2@470,1678.5 476.5,1685 497.5,1685 v1(510,1697.5) ; v1(1640,1640) C25.2@1640,1678.5 ; v1(2190,960) C11.2@2190,998.5
  Bottom Layer w25: R25.1@977.01,620 v1(1020,620) ; R26.1@977.01,710 v1(1020,710)
  Bottom Layer w26: C9.2@1984.57,270 1984.57,215.43 v1(2010,190)
  other v1: 350,190 410,190 470,190 530,190 610,190 670,190 730,190 790,190 870,190 930,190 990,190 1050,190 1130,190 1190,190 1250,190 1310,190 1390,190 1450,190 1510,190 1570,190 1650,190 1710,190 1770,190 1830,190 1890,190 1950,190 2070,190 2895,370 2895,420 2895,467.64 2895,515.51 60,525 115,525 850,525 2805,545 2855,545 1130,560 1250,560 1430,560 1550,560 60,575 1130,605 1250,605 1430,605 1550,605 60,625 1130,650 1248.78,650 1430,650 1550,650 60,675 1700,685 1750,685 1800,685 1850,685 60,725 115,725 60,776.58 60,825 60,875 1745,875 1785,875 1825,875 1865,875 60,925 1680,1075 1720,1075 1760,1075 1800,1075 2625,1085 2685,1085 2780,1085 2840,1085 1130,1100 1250,1100 1430,1100 1550,1100 2595,1115 2670,1115 2805,1115 2875,1115 1130,1144.61 1250,1144.61 1430,1144.61 1550,1144.61 200,1150 50,1152.18 1130,1190 1250,1190 1430,1190 1550,1190 2595,1250 2670,1250 2805,1250 2875,1250 50,1300 200,1300 352.5,1300 1350,1300 1500,1300 949.59,1400 1100,1400.34 1250,1402.5 1250,1455 1197.5,1505 1250,1505 1197.5,1555 1250,1555 1305,1555 1197.5,1605 1250,1605 1100,1655 1150,1655 1197.5,1655 1250,1655 1250,1705 877.5,1715 1197.5,1757.5 1250,1757.5 2045,1916.59 2100,1916.59 2299.92,1925 2349.53,1925 2400,1925 2510,1925 2560,1925 2610,1925 50,1950 200,1950 2073.43,1950.08 3200,1950 2275,2000 2425,2000 2485,2000 2635,2000 2275,2050 2425,2050 2485,2050 2635,2050 2900,2250
  other v2: 550,1035 620,1035 655,1035 690,1035 585,1070 620,1070 655,1070 585,1105 620,1105 655,1105 2290,1185 2360,1185 2395,1185 2430,1185 2290,1220 2360,1220 2395,1220 2325,1255 2360,1255 2395,1255 1740,1865 1810,1865 1845,1865 1880,1865 1775,1900 1810,1900 1845,1900 1775,1935 1810,1935 1845,1935
NetC1_2: C1.2 D3.2 R3.2 U1.6 | length 460.5
  Top Layer w25: v1(2325,175) 2398.22,175 2423.93,149.29 D3.2@2500,149.29
  Bottom Layer w10: R3.2@2120,177.01 2208.43,177.01 C1.2@2210,175.43 2324.57,175.43 v1(2325,175) 2342.8,157.2 U1.6@2342.8,113.39
NetC9_1: C9.1 R2.1 | length 77.6
  Bottom Layer w10: C9.1@2055.43,270 R2.1@2132.99,270
NetC10_1: C10.1 L1.1 U2.36 | length 170.2
  Bottom Layer w8: 2210.43,1246.93 2221.61,1235.75 U2.36@2246.02,1235.75
  Bottom Layer w20: L1.1@2090,1270.08 2166.85,1270.08 C10.1@2190,1246.93 2210.43,1246.93